# Altium PCB miaow-foc-board.pcbdoc (part 9 of 10)
Units mil, origin at the board's own origin, x right, y up, seen from the top; angles counter-clockwise.
Board outline 2755.91 x 3149.61 mil, 6 copper layers (SIG1, GND2, SIG3, PWR4, GND5, SIG6), stack 60.566 mil thick; 437 components, 392 nets, 2120 pads, 1697 vias.
Unrouted connection lines stored in the file: 1090.
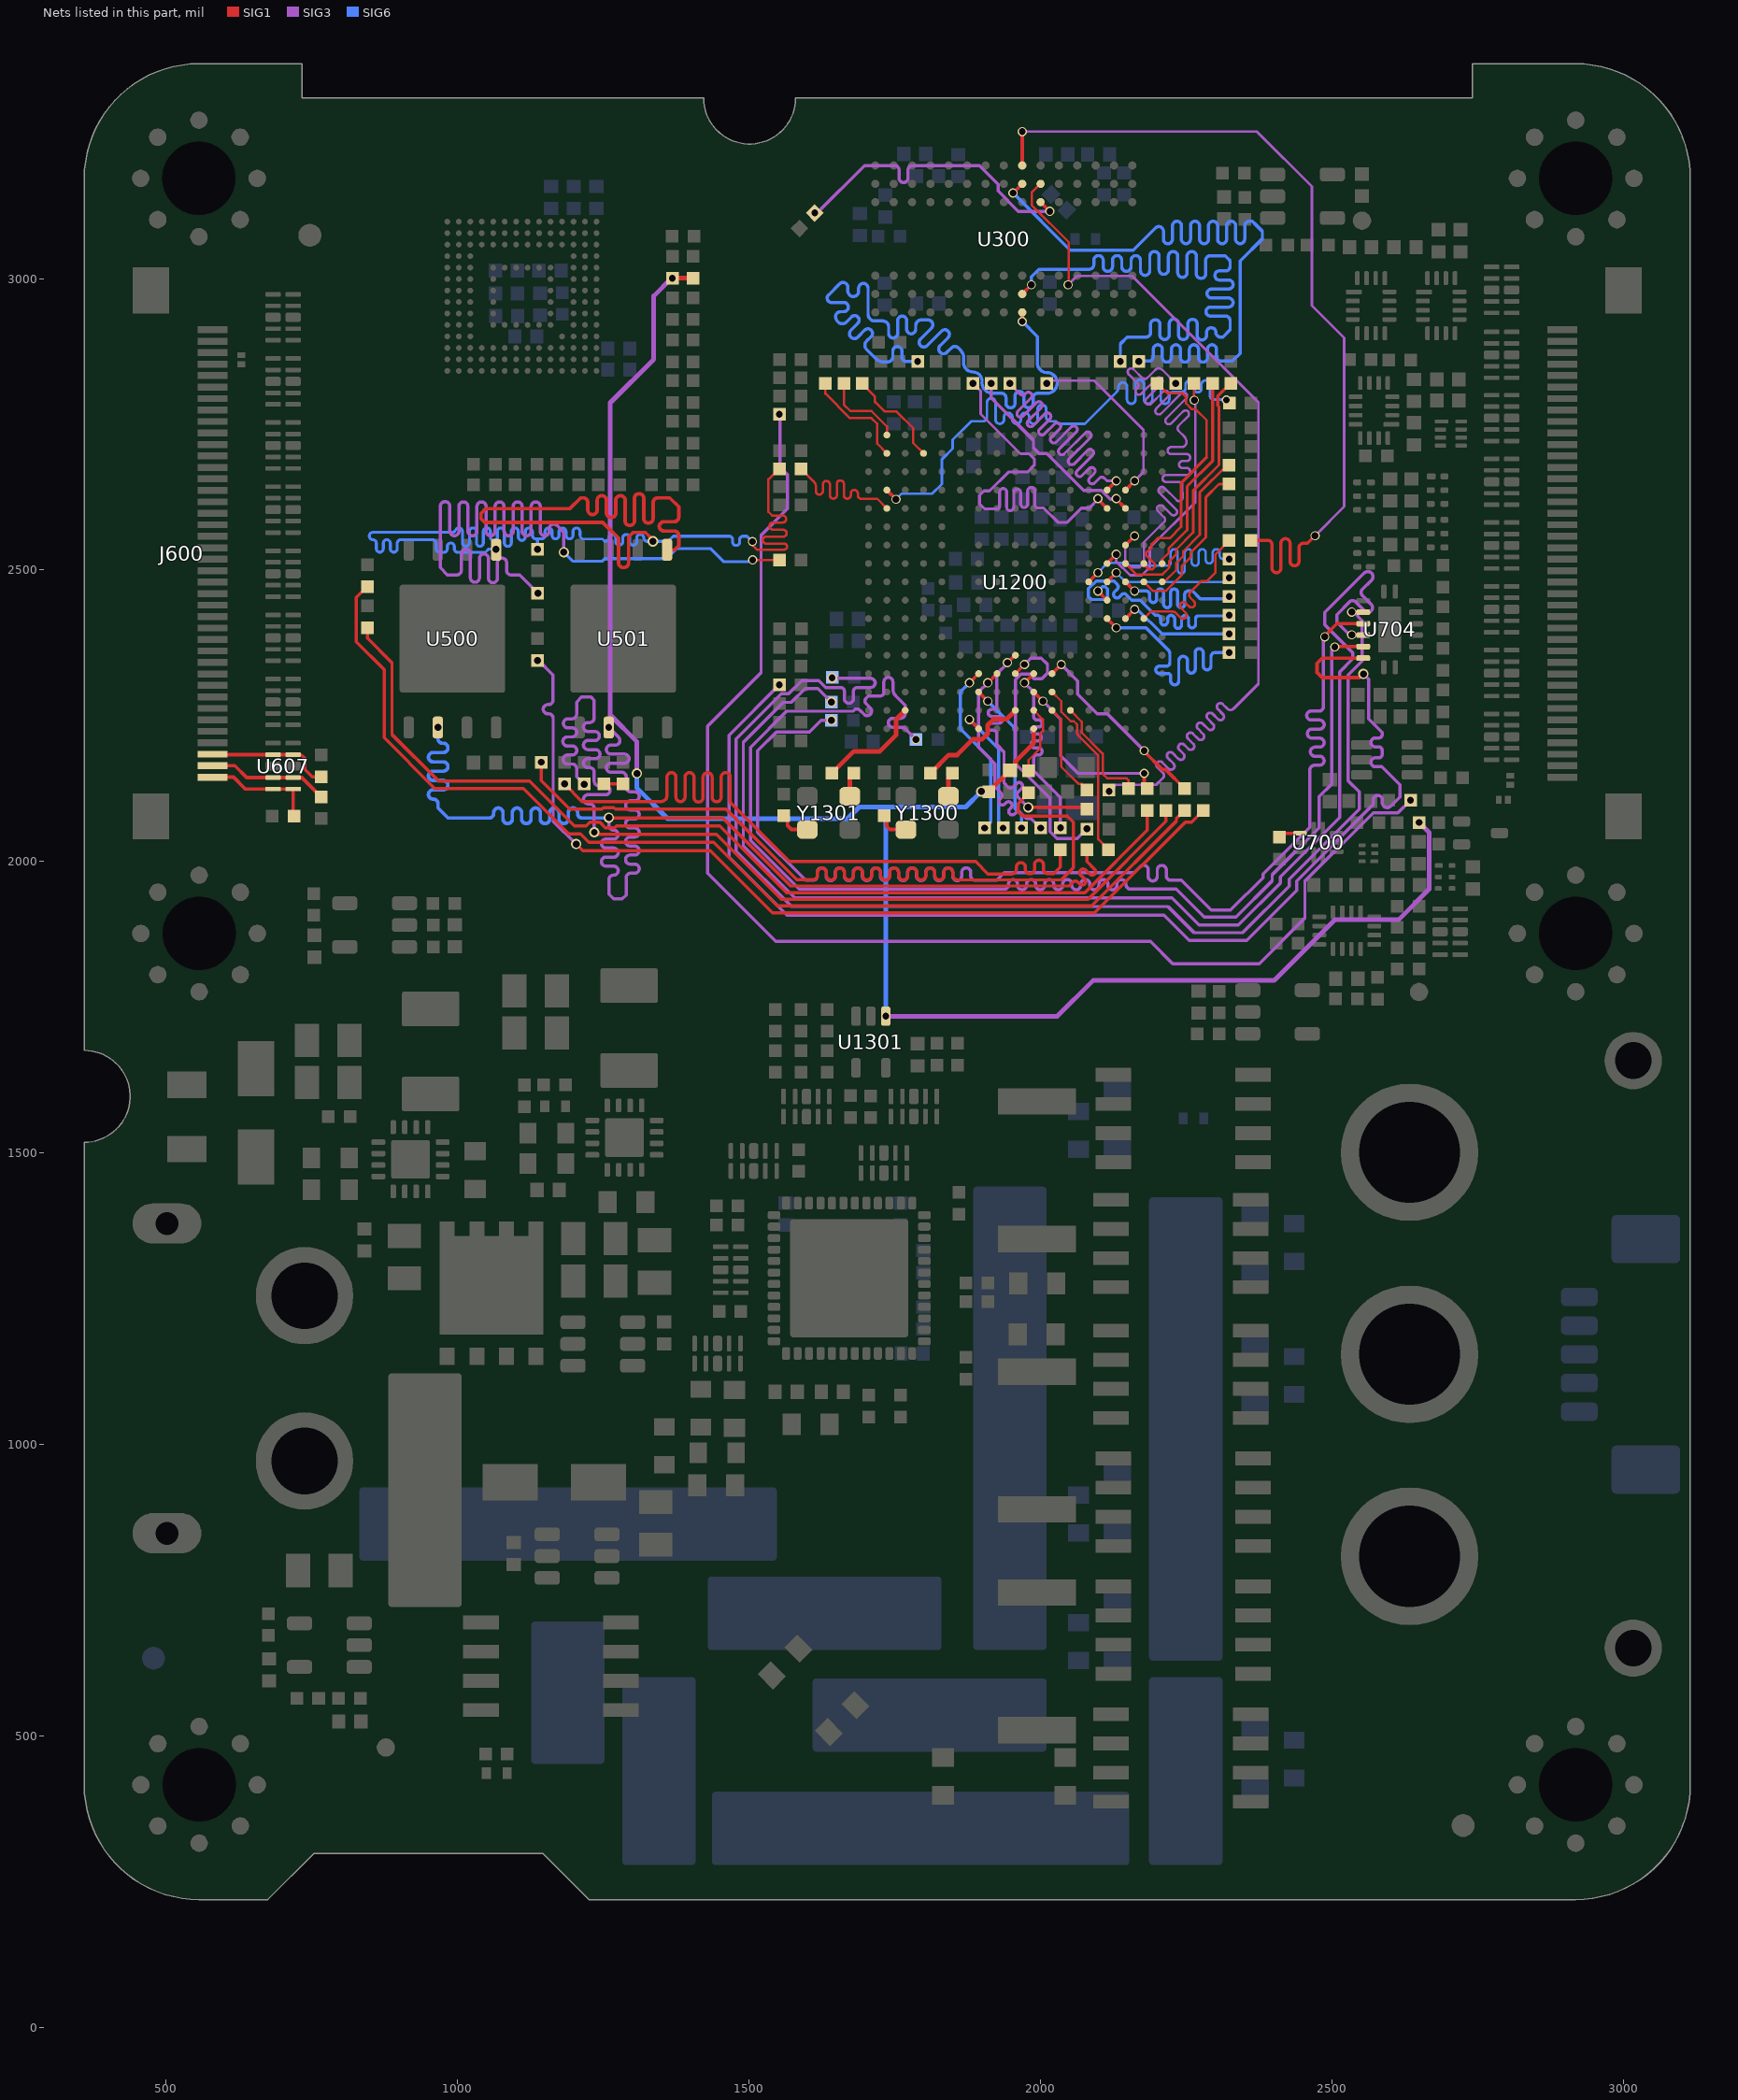
[diagram p12: the nets of this part, all layers, seen from the top]

## Via types
v1: diameter 17.72, hole 11.81, SIG1 to SIG6, tented both sides, 1223 vias
v2: diameter 15.75, hole 11.81, SIG1 to SIG6, tented both sides, 453 vias
v3: diameter 17.72, hole 11.81, SIG1 to SIG6, tented top, 21 vias

## Nets (pads, with @x,y where several pads share a name; then routed paths per layer and width w, separated by ;. In a path a pad name is that pad's centre, name@x,y a point inside that pad or via, vN(x,y) a via of type N, cw(c..) or ccw(c..) an arc to the next point about the centre after c; other vN are vias at no path point) (continued)
NetR1346_1: R1346.1 U1200.U9 | length 252
  SIG1 w4: U1200.U9@2209.03,2479.82 2212.72,2479.82 2233.34,2500.45 2233.34,2512.31 2245.05,2524.02 2245.05,2532.26 2273.62,2560.83 ; R1346.1@2320.03,2679.69 R1346.1@2324.05,2679.69
  SIG1 w5: 2273.62,2560.83 2273.62,2633.28 R1346.1@2320.03,2679.69
NetR1347_1: R1347.1 U1200.R13 | length 341.9
  SIG1 w6: v2@2130.29,2621.55 U1200.R13@2146.04,2605.81
  SIG3 w5.5: v2(1915.89,2820.56) 1915.89,2795.18 1988.18,2722.89 1988.18,2709.41 1997.72,2699.88 2010.93,2699.88 2074,2636.82 2104.89,2636.82 2120.16,2621.55 v2@2130.29,2621.55
  other v2: 2130.29,2622.55
NetR1348_1: R1348.1 U1200.T9 | length 282.6
  SIG1 w4: U1200.T9@2177.53,2479.82 2192.68,2464.67 2215.82,2464.67 2242.51,2491.36 2242.51,2506.69 2257.67,2521.85 2257.67,2529.93 2284.16,2556.42
  SIG1 w5: 2284.16,2556.42 2284.16,2625.25 2306.47,2647.56 R1348.1@2324.05,2647.56
NetR1349_1: R1349.1 U1200.P13 | length 761.6
  SIG1 w6: v2@2098.79,2621.55 U1200.P13@2114.54,2605.81
  SIG3 w5: v2@1884.13,2820.69 1897.52,2807.31 1897.52,2767.77 1965.59,2699.69 1980.48,2699.69 1989.36,2690.82 ; 1989.52,2690.82 1989.52,2679.82 1977.82,2668.12 1945.04,2668.12 1912.84,2635.92 1903.16,2635.92 1895.6,2628.36 1895.6,2613.51 1904.21,2604.9 1925.27,2604.9 ccw(c1925.27,2609.75) 1930.12,2609.75 1930.12,2633.98 cw(c1936.12,2633.98) 1942.12,2633.98 1942.12,2607.92 ccw(c1948.16,2607.9) 1954.2,2607.92 1954.2,2633.08 cw(c1960.2,2633.08) 1966.2,2633.08 1966.2,2613.31 ccw(c1972.2,2613.31) 1978.2,2613.31 1978.2,2635.95 cw(c1984.2,2635.95) 1990.2,2635.95 1990.2,2612.61 ccw(c1996.31,2612.61) 1996.31,2606.5 2005.76,2606.5 2030.78,2581.48 2045.51,2581.48 2070.29,2606.26 2083.73,2606.26 v2@2099.27,2621.79
  other v2: 2098.79,2622.55 1884.27,2820.56
NetR1350_1: R1350.1 U1200.P9 | length 225.5
  SIG1 w6: U1200.P9@2114.54,2479.82 v2(2130.29,2495.57)
  SIG6 w4: v2(2130.29,2495.57) 2146.04,2479.82 2316.95,2479.82 v2(2324.05,2486.93)
NetR1351_1: R1351.1 U1200.P14 | length 877
  SIG1 w6: U1200.P14@2114.54,2637.3 v2(2130.29,2653.05)
  SIG3 w5: v2(1947.51,2820.56) 1947.51,2819.75 1952.94,2814.33 1965.35,2801.91 ccw(c1969.59,2806.15) 1973.84,2801.91 1975.37,2803.44 cw(c1979.61,2799.2) 1983.85,2803.44 cw(c1979.61,2799.2) 1983.85,2794.96 1961.55,2772.65 ccw(c1965.79,2768.41) 1970.03,2764.17 1993.21,2787.34 cw(c1997.45,2783.1) 2001.69,2787.34 cw(c1997.45,2783.1) 2001.69,2778.86 1979.04,2756.2 ccw(c1983.28,2751.96) 1987.52,2747.72 2007.9,2768.1 cw(c2012.15,2763.85) 2016.39,2768.1 cw(c2012.15,2763.85) 2016.39,2759.61 1998.73,2741.95 ccw(c2002.97,2737.71) 1998.73,2733.47 ccw(c2002.97,2737.71) 2007.22,2733.47 2024.77,2751.02 cw(c2029.02,2746.78) 2033.34,2742.62 2018.88,2728.16 ccw(c2023.12,2723.92) 2018.88,2719.68 ccw(c2023.12,2723.92) 2027.36,2719.68 2053.15,2745.46 cw(c2057.41,2741.24) 2061.63,2736.97 2032.67,2708.01 ccw(c2036.92,2703.77) 2032.67,2699.53 ccw(c2036.92,2703.77) 2041.16,2699.53 2077.03,2735.4 cw(c2081.27,2731.16) 2085.51,2726.91 2049.64,2691.04 ccw(c2053.89,2686.8) 2049.64,2682.56 ccw(c2053.89,2686.8) 2058.13,2682.56 2081.11,2705.54 cw(c2085.35,2701.3) 2089.59,2697.05 2063.1,2670.56 ccw(c2067.34,2666.32) 2071.59,2662.07 2083.79,2674.28 cw(c2088.06,2670.06) 2092.28,2665.79 2084.67,2658.18 ccw(c2088.93,2653.96) 2093.15,2649.7 2101.11,2657.66 cw(c2105.36,2653.42) 2109.6,2657.66 2111.01,2656.25 2114.21,2653.05 v2(2130.29,2653.05)
NetR1352_1: R1352.1 U1200.N9 | length 450
  SIG1 w6: U1200.N9@2083.05,2479.82 v2(2098.79,2495.57)
  SIG6 w4: v2(2098.79,2495.57) 2115.88,2512.65 2139.2,2512.65 2144.27,2507.59 2218.41,2507.59 ccw(c2218.41,2512.97) 2223.8,2512.97 2223.8,2529.85 cw(c2229.8,2529.85) 2235.8,2529.85 2235.8,2500.18 ccw(c2241.8,2500.18) 2247.8,2500.18 2247.8,2529.85 cw(c2253.8,2529.85) 2259.8,2529.85 2259.8,2513.43 ccw(c2265.8,2513.43) 2271.8,2513.43 2271.8,2529.85 cw(c2277.8,2529.85) 2283.8,2529.85 2283.8,2517.37 ccw(c2289.8,2517.37) 2295.8,2517.37 2295.8,2529.85 cw(c2301.8,2529.85) 2307.8,2529.85 2307.8,2525.06 ccw(c2313.8,2525.06) 2313.8,2519.06 2322.68,2519.06 v2(2324.05,2519.06)
NetR1353_1: R1353.1 U1200.R14 | length 318.9
  SIG1 w6: U1200.R14@2146.04,2637.3 v2(2161.79,2653.05)
  SIG3 w4.5: v2(2010.76,2820.56) 2015.2,2825 2092.25,2825 2176.92,2740.33 2176.92,2719.73 2176.97,2719.68 2176.97,2707.87 2176.92,2707.82 2176.92,2668.19 v2(2161.79,2653.05)
NetR1354_1: R1354.1 U1200.P10 | length 456.8
  SIG1 w4: R1354.1@2263.73,2820.25 2263.73,2791.31 v2@2264.16,2790.88
  SIG1 w6: U1200.P10@2114.54,2511.32 v2(2130.29,2527.07)
  SIG3 w4.5: v2(2130.29,2527.07) 2130.29,2514.86 2154.09,2491.06 2174.22,2491.06 2187.76,2504.59 2187.76,2538.42 2265.84,2616.51 2265.84,2789.7 v2(2264.16,2791.38)
NetR1355_1: R1355.1 U1200.D16 | length 175.7
  SIG1 w4: R1355.1@1694.54,2820.56 1694.54,2818.98 1716.35,2797.16 1716.35,2788.6 1732.94,2772 1753.22,2772 1781.71,2743.52 1781.71,2718.17 U1200.D16@1799.58,2700.29
NetR1356_1: R1356.1 U1200.R10 | length 449.5
  SIG1 w4: U1200.R10@2146.04,2511.32 2164.66,2492.7 2209.61,2492.7 2221.36,2504.44 2221.36,2515.43 2233.4,2527.47 2233.4,2535.67 2262.61,2564.88
  SIG1 w5: 2262.61,2564.88 2262.61,2636.67 2306.36,2680.42 2306.36,2780.55 2304.39,2782.52 2304.39,2798.4 2326.24,2820.25 R1356.1@2326.97,2820.25
NetR1357_1: R1357.1 U1200.B17 | length 140.4
  SIG1 w4: R1357.1@1662.91,2820.56 1662.91,2784.11 1674.24,2772.78 1710.36,2772.78 1736.59,2746.56 U1200.B17@1736.59,2731.79
NetR1358_1: R1358.1 U1200.T10 | length 456.7
  SIG1 w4: U1200.T10@2177.53,2511.32 2177.53,2509.53 2186.05,2501.01 2192.06,2501.01 2196.7,2505.65 2196.7,2510.37 2181.56,2525.52 2181.56,2529.38 2190.78,2538.6 2190.78,2544.36 2201.2,2554.77 2222.16,2554.77 2241.74,2574.35 ; R1358.1@2200.49,2820.56 2217.53,2803.52 2243.07,2803.52 2250.18,2796.41 2250.18,2785.8 2259.99,2775.99 2266.29,2775.99 2285.41,2756.86 2285.41,2693.44
  SIG1 w5: 2241.74,2574.35 2241.74,2649.77 2285.41,2693.44
NetR1359_1: R1359.1 U1200.B16 | length 185.3
  SIG1 w4: R1359.1@1631.29,2820.56 1631.29,2802.88 1673.34,2760.83 1710.22,2760.83 1720.03,2751.02 1720.03,2716.99 U1200.B16@1736.59,2700.43
NetR1360_1: R1360.1 U1200.U10 | length 344.6
  SIG1 w4: U1200.U10@2209.03,2511.32 2209.03,2518.44 2220.37,2529.79 2220.37,2537.37 2251.93,2568.93
  SIG1 w5: 2251.93,2568.93 2251.93,2643.69 2295.55,2687.3 R1360.1@2295.55,2820.06
NetR1361_1: R1361.1 U1200.R11 | length 1244.9
  SIG1 w6: U1200.R11@2146.04,2542.81 v2(2161.79,2558.56)
  SIG3 w4: v2(2161.79,2558.56) 2145.31,2542.09 2145.31,2515.47 2156.2,2504.58 2170.25,2504.58 2177.63,2511.96 2177.63,2547.67 2212.23,2582.26 ccw(c2207.99,2586.51) 2212.23,2590.75 2201.85,2601.13 cw(c2206.09,2605.37) 2210.34,2609.61 2224.43,2595.52 ccw(c2228.67,2599.76) 2232.91,2604 2204.4,2632.52 cw(c2208.64,2636.76) 2212.89,2641 2233.84,2620.05 ccw(c2238.03,2624.24) 2243.96,2624.24 2243.7,2643.52 2243.7,2645.52 ccw(c2238.13,2645.52) 2238.13,2651.1 2215.64,2651.1 cw(c2215.64,2657.1) 2215.64,2663.1 2251.16,2663.1 ccw(c2251.16,2669.1) 2251.16,2675.1 2243.92,2675.1 cw(c2243.92,2681.1) 2243.92,2687.1 2251.16,2687.1 ccw(c2251.16,2693.1) 2251.16,2699.1 2224.51,2699.1 cw(c2224.51,2705.1) 2224.51,2711.1 2242.43,2711.1 ccw(c2242.43,2719.59) 2250.92,2719.59 ccw(c2237.49,2719.59) 2246.98,2729.08 2237.08,2738.98 cw(c2241.33,2743.23) 2237.08,2747.47 2253.33,2763.71 ccw(c2249.08,2767.95) 2244.84,2772.19 2224.66,2752.01 cw(c2220.42,2756.26) 2216.17,2760.5 2249.93,2794.26 ccw(c2245.69,2798.5) 2241.45,2802.74 2207.48,2768.78 cw(c2203.24,2773.02) 2199,2777.26 2219.05,2797.32 ccw(c2214.81,2801.56) 2210.57,2805.8 2190.47,2785.71 cw(c2186.23,2789.95) 2181.98,2794.19 2207.96,2820.16 ccw(c2203.71,2824.41) 2199.47,2828.65 2173.53,2802.71 cw(c2169.28,2806.97) 2165.02,2811.22 2166.43,2812.63 ccw(c2162.19,2816.87) 2166.43,2821.12 2151.68,2835.87 cw(c2155.92,2840.11) 2160.17,2844.35 2174.92,2829.6 ccw(c2179.16,2833.84) 2183.4,2829.6 2197.28,2843.48 cw(c2203.23,2837.53) 2209.19,2843.48 v2(2232.11,2820.56)
NetR1362_1: R1362.1 U1200.L2 | length 163.5
  SIG1 w4: U1200.L2@2020.05,2259.35 2035.8,2243.6 2035.8,2162.72 2065.66,2132.86 2071.26,2132.86 R1362.1@2080.09,2124.04
NetR1363_1: R1363.1 U1200.G4 | length 303.8
  SIG1 w5.5: v2(1878.32,2306.59) U1200.G4@1894.07,2322.34
  SIG6 w5.5: v2(1878.32,2306.59) 1862.57,2290.85 1862.57,2227.85 1914.83,2175.6 1914.83,2118.66 1914.83,2067.94 v1(1904.42,2057.53)
NetR1364_1: R1364.1 U1200.M2 | length 194.9
  SIG1 w4: U1200.M2@2051.55,2259.35 2071.19,2239.71 2071.19,2220.71 2106.91,2185 2106.91,2150.64 2114.66,2142.9 2147.85,2142.9 2151.4,2139.34 R1364.1@2151.4,2125.28
NetR1365_1: R1365.1 U1200.G3 | length 263.8
  SIG1 w6: U1200.G3@1894.07,2290.85 v2(1909.82,2275.1)
  SIG6 w6: v2(1909.82,2275.1) 1956.44,2228.47 1956.44,2090.82 1967.68,2079.58 v1(1967.68,2057.53)
NetR1366_1: R1366.1 U1200.G1 | length 232.3
  SIG1 w5.5: v2(1878.32,2243.6) U1200.G1@1894.07,2227.85
  SIG6 w5.5: v2(1878.32,2243.6) 1928.35,2193.57 1928.35,2076.43 1928.35,2065.23 v1(1936.05,2057.53)
NetR1367_1: R1367.1 U1200.H4 | length 365.2
  SIG1 w5.5: v2(1909.82,2306.59) U1200.H4@1925.56,2322.34
  SIG3 w5.5: v2(1909.82,2306.59) 1894.07,2290.85 1894.07,2195.69 1922.25,2167.51 1922.25,2127.8 1924.94,2125.12 1932.49,2117.57 cw(c1928.24,2113.32) 1932.49,2109.08 1930.57,2107.17 ccw(c1934.82,2102.92) 1930.57,2098.68 ccw(c1934.82,2102.92) 1939.06,2098.68 1941.17,2100.79 cw(c1945.41,2096.55) 1949.65,2100.79 cw(c1945.41,2096.55) 1949.65,2092.3 1947.54,2090.2 ccw(c1951.79,2085.95) 1947.54,2081.71 ccw(c1951.79,2085.95) 1956.03,2081.71 1957.94,2083.62 cw(c1962.19,2079.38) 1966.43,2083.62 1967.84,2082.21 1976.14,2073.92 1983.93,2073.92 v1(2000.32,2057.53)
NetR1368_1: R1368.1 U1200.J5 | length 489.9
  SIG1 w5.5: v2(1943.49,2341.23) 1956.09,2353.84 U1200.J5@1957.06,2353.84 ; v1(1979.19,2093.07) 2078.32,2093.07 R1368.1@2080.09,2091.3
  SIG3 w5.5: v2(1943.49,2341.23) 1943.49,2340.27 1925.56,2322.34 1925.56,2278.84 1925.56,2267.08 cw(c1919.56,2267.08) 1919.56,2261.08 1916.44,2261.08 ccw(c1916.44,2255.08) 1916.44,2249.08 1928.94,2249.08 cw(c1928.94,2243.08) 1928.94,2237.08 1915.6,2237.08 ccw(c1915.6,2231.08) 1915.6,2225.08 1919.56,2225.08 cw(c1919.56,2219.08) 1925.56,2219.08 1925.56,2217.08 1925.56,2200.12 1937.67,2188.01 1937.67,2134.59 1944.67,2127.59 ccw(c1948.91,2131.83) 1953.15,2127.59 1959.37,2133.81 cw(c1963.62,2129.57) 1967.86,2133.81 cw(c1963.62,2129.57) 1967.86,2125.33 1961.64,2119.11 ccw(c1965.88,2114.86) 1961.64,2110.62 v1(1979.19,2093.07)
NetR1369_1: R1369.1 U1200.J4 | length 512.6
  SIG1 w5.5: U1200.J4@1957.06,2322.34 v2(1972.81,2338.09)
  SIG3 w5.5: v2(1972.81,2338.09) 1983.89,2349.17 2001.56,2349.17 2012.19,2338.55 2012.19,2323.42 2002.55,2313.78 1988.92,2313.78 1981.2,2321.5 1966.9,2321.5 1957.06,2311.66 1957.06,2167.71 2016.33,2108.44 2016.33,2076.43 2016.33,2051.5 2028.4,2039.43 2063.28,2039.43 v1(2080.09,2056.25)
NetR1370_1: R1370.1 U1200.K2 | length 120.5
  SIG1 w4: R1370.1@1979.73,2155.51 1979.73,2174.17 1999.65,2194.1 1999.65,2219.36 2004.3,2224.02 2004.3,2243.6 U1200.K2@1988.56,2259.35
NetR1371_1: R1371.1 U1200.K3 | length 312.5
  SIG1 w6: U1200.K3@1988.56,2290.85 v2(2004.3,2275.1) ; v2(2178.18,2151.31) 2178.18,2130.49 R1371.1@2183.39,2125.28
  SIG3 w5.5: v2(2004.3,2275.1) 2035.24,2244.16 2035.24,2181.11 2065.03,2151.31 v2(2178.18,2151.31)
NetR1373_1: R1373.1 U1200.K4 | length 365.8
  SIG1 w6: v2(1972.81,2306.59) U1200.K4@1988.56,2322.34
  SIG3 w5.5: v2(1972.81,2306.59) 1988.56,2290.85 1988.56,2262.53 1988.56,2248.92 ccw(c1994.56,2248.92) 1994.56,2242.92 1996.93,2242.92 cw(c1996.93,2236.92) 1996.93,2230.92 1990.98,2230.92 ccw(c1990.98,2224.92) 1990.98,2218.92 1995.8,2218.92 cw(c1995.8,2212.92) 1995.8,2206.92 1990.19,2206.92 ccw(c1990.19,2200.92) 1990.19,2194.92 1996.93,2194.92 cw(c1996.93,2188.92) 1996.93,2182.92 1994.56,2182.92 ccw(c1994.56,2176.92) 1988.56,2176.92 1988.56,2162.92 1988.56,2156 2034.57,2109.99 v1(2034.57,2057.59)
NetR1374_1: R1374.1 U1200.L4 | length 336.1
  SIG1 w6: U1200.L4@2020.05,2322.34 v2(2035.8,2338.09) ; v2@2177.84,2190.09 2177.84,2189.35 2209.41,2157.78 2214.87,2157.78 R1374.1@2247.37,2125.28
  SIG3 w5.5: v2(2035.8,2338.09) 2063.98,2309.91 2063.98,2287.17 2097.68,2253.46 2114.8,2253.46 v2(2178.18,2190.09)
NetR1375_1: R1375.1 U1200.L3 | length 314.1
  SIG1 w4: U1200.L3@2020.05,2290.85 2035.8,2275.1 2035.8,2256.89 2052.04,2240.66 2057.51,2240.66 2063.48,2234.69 2063.48,2219.57 2063.69,2219.36 2063.69,2217.61 2099.26,2182.03 2099.26,2181.63 2099.39,2181.5 2099.39,2037.99 R1375.1@2117.19,2020.19
NetR1376_1: R1376.1 U1200.J2 | length 197.5
  SIG1 w8: R1376.1@1811.54,2154.51 1814.55,2154.51 1842.83,2182.79 1857.14,2182.79 1884.32,2209.97 1900.32,2209.97 1909.72,2219.38 1909.72,2234.03 1919.59,2243.9 1941.61,2243.9 U1200.J2@1957.06,2259.35
NetR1376_2: R1376.2 Y1300.3 | length 33.2
  SIG1 w8: Y1300.3@1842.31,2112.3 R1376.2@1842.31,2145.54
NetR1377_1: R1377.1 U1200.B13 | length 296.2
  SIG1 w4: R1377.1@1589.45,2673.9 1610.73,2652.62 cw(c1601.01,2642.9) 1614.76,2642.9 1614.76,2635.59 ccw(c1620.75,2635.56) 1626.75,2635.56 1626.75,2646.99 cw(c1632.75,2646.99) 1638.75,2646.99 1638.75,2628.49 ccw(c1644.75,2628.49) 1650.75,2628.49 1650.75,2647.91 cw(c1656.75,2647.91) 1662.75,2647.91 1662.75,2628.6 ccw(c1668.75,2628.6) 1674.75,2628.6 1674.75,2631.52 cw(c1680.75,2631.52) 1686.75,2631.52 1686.75,2628.34 ccw(c1692.75,2628.34) 1692.75,2622.34 1720.06,2622.34 U1200.B13@1736.59,2605.81
NetR1378_1: R1378.1 U1200.T7 | length 289.3
  SIG1 w4: U1200.T7@2177.53,2416.83 2189.42,2428.71 2227.21,2428.71 cw(c2227.21,2421.23) 2232.51,2426.52 2240.68,2418.35 ccw(c2244.92,2422.6) 2249.16,2418.35 ccw(c2244.92,2422.59) 2249.16,2426.84 2241.26,2434.74 cw(c2245.5,2438.98) 2249.74,2443.23 2255.23,2437.74 ccw(c2259.47,2441.98) 2263.71,2437.74 ccw(c2259.47,2441.98) 2263.71,2446.23 2257.58,2452.36 cw(c2262.6,2457.38) 2257.58,2462.41 2276.18,2481.01 2285.8,2481.01 2300.54,2495.76 2300.54,2527.22 2324.05,2550.73 R1378.1@2324.05,2551.18
NetR1379_1: R1379.1 U1200.R7 | length 201.8
  SIG1 w6: U1200.R7@2146.04,2416.83 v2(2161.79,2432.58)
  SIG6 w5.5: v2(2161.79,2432.58) 2166.77,2432.58 2209.12,2390.22 v2@2323.73,2390.22
  other v2: 2324.05,2390.55
NetR1380_1: R1380.1 U1200.P7 | length 481.6
  SIG1 w6: U1200.P7@2114.54,2416.83 v2(2130.29,2401.08)
  SIG6 w5.5: v2(2130.29,2401.08) 2181.42,2401.08 2219.01,2363.49 cw(c2211.26,2355.73) 2222.22,2355.73 2222.22,2340.88 cw(c2216.52,2340.88) 2216.52,2335.19 2204.32,2335.19 ccw(c2204.3,2328.92) 2204.32,2322.66 2218.73,2322.66 cw(c2218.73,2317.71) 2223.68,2317.71 2223.68,2309.96 ccw(c2230.58,2309.92) 2237.48,2309.96 2237.48,2344.65 cw(c2245,2344.63) 2252.52,2344.65 2252.52,2329.85 ccw(c2259.06,2329.82) 2265.61,2329.85 2265.61,2358.36 cw(c2272.48,2358.41) 2279.36,2358.36 2279.36,2335.62 ccw(c2286.1,2335.64) 2292.84,2335.62 2292.84,2351.85 cw(c2299.41,2351.85) 2299.41,2358.42 v2(2324.05,2358.42)
NetR1381_1: R1381.1 Y1301.3 | length 35.3
  SIG1 w8: Y1301.3@1672.96,2111.95 R1381.1@1672.96,2147.26
NetR1381_2: R1381.2 U1200.C2 | length 186
  SIG1 w8: R1381.2@1642.46,2151.5 1680.1,2189.14 1724.72,2189.14 1752.21,2216.63 1752.21,2243.48 U1200.C2@1768.08,2259.35
NetR1382_1: R1382.1 U1200.P8 | length 494
  SIG1 w6: v2(2098.79,2464.07) U1200.P8@2114.54,2448.33
  SIG6 w5.5: v2(2098.79,2464.07) 2106.19,2471.47 2110.88,2471.47 2114.93,2467.42 2114.93,2453.75 2110.47,2449.29 2110.31,2449.45 2088.12,2449.45 2082.69,2454.88 2082.69,2468.11 2095.69,2481.11 2126.32,2481.11 2131.84,2475.59 cw(c2127.59,2471.35) 2131.84,2467.1 2127.23,2462.5 ccw(c2131.48,2458.26) 2127.23,2454.02 ccw(c2131.48,2458.26) 2135.72,2454.02 2139.67,2457.96 cw(c2143.59,2454.04) 2147.51,2457.96 2156.96,2448.52 2171.1,2448.52 2196.94,2422.67 2200.33,2422.67 cw(c2200.33,2416.67) 2206.33,2416.67 2206.33,2411.58 ccw(c2212.33,2411.58) 2218.33,2411.58 2218.33,2416.46 cw(c2224.33,2416.46) 2230.33,2416.46 2230.33,2406.02 ccw(c2236.33,2406.02) 2242.33,2406.02 2242.33,2416.14 cw(c2248.33,2416.14) 2254.33,2416.14 2254.33,2406.87 ccw(c2260.33,2406.87) 2266.33,2406.87 2266.33,2416.67 cw(c2271.08,2416.67) 2271.08,2421.43 2322.81,2421.43 v2(2324.05,2422.67)
NetR1384_1: R1384.1 U1200.R9 | length 329.5
  SIG1 w6: U1200.R9@2146.04,2479.82 v2(2161.79,2464.07)
  SIG6 w5.5: v2(2161.79,2464.07) 2167.63,2464.07 2181.63,2464.07 cw(c2181.63,2458.07) 2187.63,2458.07 2187.63,2450.25 ccw(c2193.63,2450.25) 2199.63,2450.25 2199.63,2461.67 cw(c2205.63,2461.67) 2211.63,2461.67 2211.63,2441.44 ccw(c2217.63,2441.44) 2223.63,2441.44 2223.63,2461.67 cw(c2229.63,2461.67) 2235.63,2461.67 2235.63,2441.44 ccw(c2241.63,2441.44) 2247.63,2441.44 2247.63,2458.07 cw(c2253.63,2458.07) 2253.63,2464.07 2260.84,2464.07 2274.35,2450.56 2319.81,2450.56 v2(2324.05,2454.8)
NetR1386_2: R1386.2 Y1300.1 | length 57.3
  SIG1 w6: R1386.2@1729.78,2078.72 1736.61,2071.9 1736.61,2060.15 1741.54,2055.21 Y1300.1@1770.46,2055.21
NetR1387_2: R1387.2 Y1301.1 | length 56.3
  SIG1 w6: R1387.2@1559.44,2078.38 1566.27,2071.55 1566.27,2061.55 1572.96,2054.86 Y1301.1@1600.13,2054.86
NOR_CS: R500.1 R1377.2 U500.1 U501.1 | length 2990.3
  SIG1 w4: v2(1505.85,2548.84) 1505.85,2543.11 1513.74,2535.22 1560.5,2535.22 ccw(c1560.5,2540.35) 1560.5,2545.49 1529.67,2545.49 cw(c1529.65,2551.37) 1529.67,2557.26 1558.58,2557.26 ccw(c1558.58,2563.26) 1558.58,2569.26 1541.3,2569.26 cw(c1541.34,2575.48) 1539.9,2569.42 cw(c1541.34,2575.48) 1539.9,2581.53 cw(c1541.34,2575.48) 1541.3,2581.7 1557.91,2581.7 ccw(c1557.88,2587.64) 1557.91,2593.59 1539.59,2593.59 1533.39,2599.79 1533.39,2655.6 R1377.2@1551.69,2673.9
  SIG1 w6: v1@1334.62,2552.29 1322.3,2564.61 1301.23,2564.61 1293.56,2556.94 1293.56,2513.01 cw(c1284.88,2512.96) 1276.2,2513.01 1276.2,2554.77 1249.11,2581.87 1046.59,2581.87 1040.22,2588.23 1040.22,2597.13 1048.71,2605.62 1192.8,2605.62 1211.15,2623.97 1215.47,2623.97 cw(c1215.47,2615.97) 1223.47,2615.97 1223.47,2603.15 ccw(c1231.47,2603.15) 1239.47,2603.15 1239.47,2619.75 cw(c1247.47,2619.75) 1255.47,2619.75 1255.47,2598.18 ccw(c1263.47,2598.18) 1271.47,2598.18 1271.47,2619.75 cw(c1279.47,2619.75) 1287.47,2619.75 1287.47,2584.53 ccw(c1295.47,2584.53) 1303.47,2584.53 1303.47,2623.07 cw(c1311.47,2623.07) 1319.47,2623.07 1319.47,2588.61 ccw(c1327.47,2588.61) 1335.47,2588.61 1335.47,2615.97 cw(c1343.47,2615.97) 1343.47,2623.97 1364.14,2623.97 1379.55,2608.56 1379.55,2591.08 cw(c1371.55,2591.08) 1371.55,2583.08 1354.11,2583.08 ccw(c1354.11,2575.08) 1354.11,2567.08 1371.55,2567.08 cw(c1371.55,2559.08) 1379.55,2559.08 1379.55,2541.95 1372.31,2534.7 U501.1@1359.36,2534.7
  SIG6 w4: 1210.04,2559.62 ccw(c1216.04,2559.62) 1216.04,2553.62 1247.95,2553.62 1252.27,2549.3
  SIG6 w5: 854.53,2552.24 cw(c854.53,2546.24) 860.53,2546.24 860.53,2536.76 ccw(c866.53,2536.76) 872.53,2536.76 872.53,2546.24 cw(c878.53,2546.24) 878.53,2552.24 cw(c878.53,2546.24) 884.53,2546.24 884.53,2536.76 ccw(c890.53,2536.76) 896.53,2536.76 896.53,2546.24 cw(c902.53,2546.24) 902.53,2552.24 956.9,2552.24 cw(c956.9,2546.01) 963.13,2546.01 963.13,2537 ccw(c969.64,2537) 969.64,2530.49 976.41,2530.49 ccw(c976.41,2536.49) 982.41,2536.49 982.41,2540.47 cw(c988.41,2540.47) 994.41,2540.47 994.41,2536.49 ccw(c1000.41,2536.49) 1000.41,2530.49 1047.68,2530.49 1053.01,2535.83 v1(1066.1,2535.83) ; 854.73,2552.24 cw(c854.73,2558.5) 854.73,2564.76 992.8,2564.76 997.75,2569.72 ; 997.4,2569.98 cw(c1002.25,2566.44) 1008.25,2566.44 1008.25,2547.05 ccw(c1014.25,2547.05) 1020.25,2547.05 1020.25,2566.44 cw(c1026.25,2566.44) 1032.25,2566.44 1032.25,2546.8 ccw(c1038.25,2546.8) 1044.25,2546.8 1044.25,2566.44 cw(c1050.25,2566.44) 1056.25,2566.44 1056.25,2556.69 ccw(c1062.25,2556.69) 1068.25,2556.69 1068.25,2566.44 cw(c1074.25,2566.44) 1080.25,2566.44 1080.25,2546.56 ccw(c1086.25,2546.56) 1092.25,2546.56 1092.25,2566.44 cw(c1098.25,2566.44) 1104.25,2566.44 1104.25,2556.88 ccw(c1110.25,2556.88) 1116.25,2556.88 1116.25,2566.14 cw(c1122.25,2566.14) 1128.25,2566.14 1128.25,2559.62 ccw(c1134.25,2559.62) 1134.25,2553.62 1134.49,2553.38 1137.24,2553.38 ; v1(1137.24,2535.83) 1137.24,2553.38 ; 1210.04,2559.62 1210.04,2566.15 ccw(c1204.04,2566.15) 1198.04,2566.15 1198.04,2559.59 cw(c1192.04,2559.59) 1186.04,2559.59 1186.04,2566.15 ccw(c1180.04,2566.15) 1174.04,2566.15 1174.04,2559.59 cw(c1168.04,2559.59) 1162.04,2559.59 1162.04,2566.15 ccw(c1156.04,2566.15) 1150.04,2566.15 1150.04,2559.62 cw(c1144.04,2559.62) 1144.04,2553.62 1137,2553.62 1137.24,2553.38 ; 1252.27,2549.3 1253.43,2549.3 ccw(c1253.43,2555.3) 1259.43,2555.3 1259.43,2555.68 ; 1259.43,2555.18 cw(c1265.43,2555.18) 1271.43,2555.18 ; 1271.43,2548.2 1271.43,2555.68 ; 1271.43,2548.7 ccw(c1277.43,2548.7) 1283.43,2548.7 ; 1283.43,2548.2 1283.43,2555.68 ; 1283.43,2555.18 cw(c1289.43,2555.18) 1295.43,2555.18 ; 1295.43,2548.2 1295.43,2555.68 ; 1295.43,2548.7 ccw(c1301.43,2548.7) 1307.43,2548.7 ; 1307.43,2548.2 1307.43,2555.68 ; 1307.43,2555.18 cw(c1313.43,2555.18) 1319.43,2555.18 ; 1319.43,2555.68 1319.43,2555.3 ccw(c1325.43,2555.3) 1325.43,2549.3 v1(1335.15,2549.3) 1361.21,2549.3 1370.09,2558.18 1466.01,2558.18 cw(c1466.01,2552.18) 1472.01,2552.18 1472.01,2548.2 ccw(c1478.01,2548.2) 1484.01,2548.2 1484.01,2552.18 cw(c1490.01,2552.18) 1490.01,2558.18 1496.51,2558.18 v2(1505.85,2548.84)
NOR_IO0: R501.1 R1373.2 | length 1357.5
  SIG1 w5.5: v1(1183.48,2133.09) 1213.48,2103.09 1349.47,2103.09 ccw(c1349.47,2112.82) 1359.2,2112.82 1359.2,2144.8 cw(c1366.95,2144.8) 1374.7,2144.8 1374.7,2110.56 ccw(c1382.45,2110.56) 1390.2,2110.56 1390.2,2144.8 cw(c1397.95,2144.8) 1405.7,2144.8 1405.7,2109.88 ccw(c1413.45,2109.88) 1421.2,2109.88 1421.2,2144.8 cw(c1428.95,2144.8) 1436.7,2144.8 1436.7,2110.29 ccw(c1444.45,2110.29) 1452.2,2110.29 1452.2,2144.8 cw(c1459.95,2144.8) 1467.7,2144.8 1467.7,2103.97 ccw(c1473.95,2103.97) 1469.53,2099.56 1569.2,1999.89 1888.96,1999.89 1910.17,1978.68 1950.39,1978.68 ccw(c1950.39,1987.14) 1958.85,1987.14 1958.85,1990.46 cw(c1966.6,1990.46) 1974.35,1990.46 1974.35,1986.68 ccw(c1982.1,1986.68) 1989.85,1986.68 1989.85,1994.52 cw(c1997.6,1994.52) 2005.35,1994.52 2005.35,1986.76 ccw(c2013.1,1986.76) 2013.1,1979.01 2023.12,1979.01 2034.3,1990.2 R1373.2@2034.3,2020.51
NOR_IO1: R503.1 R1374.2 | length 1850.7
  SIG1 w5.5: R503.1@845.15,2471.92 826.28,2453.05 826.28,2376.92 874.02,2329.18 874.02,2212.29 961.08,2125.23 1112.79,2125.23 1190.57,2047.45 1210.8,2047.45 1225.42,2032.83 1439.13,2032.83 1548.17,1923.79 2087.78,1923.79 2233.43,2069.44 2233.43,2073.93 R1374.2@2247.37,2087.88
NOR_IO2: R505.1 R1371.2 | length 1694.8
  SIG1 w5.5: R505.1@845.15,2400.95 845.15,2383.35 887.46,2341.03 887.46,2217.83 966.91,2138.38 ; 966.91,2137.71 1123.43,2137.71 1200.21,2060.93 1220.21,2060.93 1226.69,2067.41 1244.23,2067.41 1253.47,2058.17 1269.75,2058.17 1272.48,2060.89 1449.91,2060.89 1564.19,1946.62 2076.39,1946.62 2183.39,2053.62 R1371.2@2183.39,2087.88
NOR_IO3: R507.1 R1370.2 | length 1466.6
  SIG1 w5.5: v1(1143.28,2170.48) 1143.28,2139.07 1192.5,2089.85 1247.47,2089.85 1250.27,2092.65 1268.15,2092.65 1270.95,2089.85 1460.59,2089.85 1581.77,1968.67 1609.82,1968.67 ccw(c1609.82,1976.38) 1617.53,1976.38 1617.53,1981.02 cw(c1625.28,1981.02) 1633.03,1981.02 1633.03,1976.06 ccw(c1640.78,1976.06) 1648.53,1976.06 1648.53,1981.02 cw(c1656.28,1981.02) 1664.03,1981.02 1664.03,1976.06 ccw(c1671.78,1976.06) 1679.53,1976.06 1679.53,1981.02 cw(c1687.28,1981.02) 1695.03,1981.02 1695.03,1976.06 ccw(c1702.78,1976.06) 1710.53,1976.06 1710.53,1981.02 cw(c1718.28,1981.02) 1726.03,1981.02 1726.03,1976.06 ccw(c1733.78,1976.06) 1741.53,1976.06 1741.53,1981.02 cw(c1749.28,1981.02) 1757.03,1981.02 1757.03,1976.06 ccw(c1764.78,1976.06) 1772.53,1976.06 1772.53,1981.02 cw(c1780.28,1981.02) 1788.03,1981.02 1788.03,1976.06 ccw(c1795.78,1976.06) 1803.53,1976.06 1803.53,1981.02 cw(c1811.28,1981.02) 1819.03,1981.02 1819.03,1976.06 ccw(c1826.78,1976.06) 1834.53,1976.06 1834.53,1981.02 cw(c1842.28,1981.02) 1850.03,1981.02 1850.03,1976.38 ccw(c1857.92,1976.38) 1857.92,1968.49 2035.69,1968.49 2056.56,1989.36 2056.56,2067.29 2046.19,2077.66 1969.73,2077.66 1962.02,2085.37 1962.02,2099.33 1979.73,2117.04 R1370.2@1979.73,2118.11
NOR_IO4: R502.1 R1334.2 | length 1790.4
  SIG1 w5.5: v1@1234.74,2046.88 1444.2,2046.88 1555.76,1935.32 2081.93,1935.32 2215.38,2068.77 R1334.2@2215.38,2087.88
  SIG3 w5.5: v1(1217.05,2132.69) 1204.18,2145.55 1204.18,2156.82 1204.18,2159.57 ccw(c1196.43,2159.57) 1196.43,2167.32 1188.77,2167.32 cw(c1188.77,2175.07) 1188.77,2182.82 1196.69,2182.82 ccw(c1196.69,2190.57) 1196.69,2198.32 1188.31,2198.32 cw(c1188.31,2206.07) 1188.31,2213.82 1196.69,2213.82 ccw(c1196.69,2221.57) 1196.69,2229.32 1189.23,2229.32 cw(c1189.23,2237.07) 1189.23,2244.82 1196.43,2244.82 ccw(c1196.43,2252.57) 1204.18,2252.57 1204.18,2271.07 1204.18,2273.76 1212.77,2282.35 1228.99,2282.35 1234.49,2276.84 1234.49,2246.32 cw(c1226.74,2246.32) 1226.74,2238.57 1223.71,2238.57 ccw(c1223.71,2230.82) 1223.71,2223.07 1235.59,2223.07 cw(c1235.59,2215.32) 1235.59,2207.57 1223.71,2207.57 ccw(c1223.71,2199.82) 1223.71,2192.07 1236.6,2192.07 cw(c1236.6,2184.32) 1236.6,2176.57 1223.71,2176.57 ccw(c1223.71,2168.82) 1223.71,2161.07 1226.74,2161.07 cw(c1226.74,2153.32) 1234.49,2153.32 1234.49,2137.82 ccw(c1242.24,2137.82) 1242.24,2130.07 1253.89,2130.07 cw(c1253.89,2122.32) 1253.89,2114.57 1223.71,2114.57 ccw(c1223.71,2106.82) 1223.71,2099.07 1226.74,2099.07 cw(c1226.74,2091.32) 1234.49,2091.32 v1(1234.49,2050.35)
NOR_IO5: R504.1 R1336.2 | length 1560.1
  SIG1 w5.5: v1(1203.5,2029.9) 1214.63,2018.77 1433.76,2018.77 1540.36,1912.17 2093.1,1912.17 2248.66,2067.73 2259.22,2067.73 R1336.2@2279.37,2087.88
  SIG3 w5.5: v1@1138.31,2345.37 1163.79,2319.89 1163.79,2277.28 cw(c1155.63,2277.28) 1154.7,2269.18 ccw(c1154.7,2261.43) 1154.7,2253.68 cw(c1155.66,2245.32) 1164.07,2245.32 1164.07,2069.34 v1(1203.5,2029.9)
  other v1: 1137.38,2345.15
NOR_IO6: R506.1 R1321.2 | length 1751.5
  SIG1 w4: v2(1506.38,2517.52) 1551.6,2517.52 R1321.2@1552.04,2517.08
  SIG3 w5.5: v1(1137.88,2460.44) 1106.5,2491.82 1091.73,2491.82 cw(c1091.73,2499.57) 1083.98,2499.57 1083.98,2512.97 ccw(c1076.23,2512.97) 1068.48,2512.97 1068.48,2486.05 cw(c1060.73,2486.05) 1052.98,2486.05 1052.98,2519.83 ccw(c1045.23,2519.83) 1037.48,2519.83 1037.48,2486.89 cw(c1029.73,2486.89) 1021.98,2486.89 1021.98,2528.05 ccw(c1014.23,2528.05) 1006.48,2528.05 1006.48,2499.57 cw(c998.73,2499.57) 998.73,2491.82 982.52,2491.82 970.26,2504.07 970.26,2609.26 cw(c978.52,2609.22) 986.77,2609.26 986.78,2566.71 ccw(c994.53,2566.71) 1002.28,2566.71 1002.28,2609.26 cw(c1010.03,2609.26) 1017.78,2609.26 1017.78,2566.71 ccw(c1025.53,2566.71) 1033.28,2566.71 1033.28,2609.26 cw(c1041.03,2609.26) 1048.78,2609.26 1048.78,2566.71 ccw(c1056.53,2566.71) 1064.28,2566.71 1064.28,2609.26 cw(c1072.03,2609.26) 1079.78,2609.26 1079.78,2566.71 ccw(c1087.53,2566.71) 1095.28,2566.71 1095.28,2609.26 cw(c1103.03,2609.26) 1110.78,2609.26 1110.78,2566.71 ccw(c1118.53,2566.71) 1126.28,2566.71 1126.28,2609.26 cw(c1134.03,2609.26) 1141.78,2609.26 1141.78,2566.71 ccw(c1149.53,2566.71) 1157.28,2566.71 1157.28,2571.19 cw(c1165.03,2571.19) 1170.51,2576.67 1182.29,2564.88 v1(1182.29,2530.72)
  SIG6 w5: v1(1182.29,2530.72) 1197.55,2515.47 1248.54,2515.47 ; 1376.06,2537.03 1433.79,2537.03 1456.12,2514.7 1503.56,2514.7 v2(1506.38,2517.52)
  SIG6 w5.5: 1248.55,2515.48 1252.42,2519.34 1358.37,2519.34 1376.06,2537.03
NOR_IO7: R508.1 R1330.2 | length 33.6
  SIG1 w6: R508.1@1250.63,2133.09 R1330.2@1284.2,2133.09
NOR_SCLK: R1375.2 U500.6 U501.6 | length 2597.2
  SIG1 w5.5: v1@1253.84,2074.74 v1@1254.17,2075.07 ; v1@1254.17,2074.98 1455.06,2074.98 1571.99,1958.06 2049.27,1958.06 2055.87,1964.66 cw(c2060.12,1960.42) 2064.36,1964.66 2067.48,1961.54 ccw(c2071.73,1965.78) 2075.97,1970.02 2069.07,1976.92 cw(c2073.33,1981.15) 2077.55,1985.41 2084.49,1978.47 ccw(c2088.74,1982.71) 2092.98,1986.95 2079.79,2000.14 R1375.2@2079.79,2020.19
  SIG3 w5.5: v1(1259.36,2229.98) 1276.34,2213 cw(c1270.86,2207.52) 1270.86,2199.77 1262.98,2199.77 ccw(c1262.98,2192.02) 1262.98,2184.27 1286.56,2184.27 cw(c1286.56,2176.52) 1286.56,2168.77 1262.98,2168.77 ccw(c1262.98,2161.02) 1262.98,2153.27 1281.56,2153.27 cw(c1281.56,2145.52) 1289.31,2145.52 1289.31,2127.32 ccw(c1297.06,2127.32) 1297.06,2119.57 1303.92,2119.57 cw(c1303.92,2111.82) 1303.92,2104.07 1296.01,2104.07 ccw(c1296.01,2096.32) 1296.01,2088.57 1303.92,2088.57 cw(c1303.92,2080.82) 1303.92,2073.07 1296.01,2073.07 ccw(c1296.01,2065.32) 1296.01,2057.57 1303.92,2057.57 cw(c1303.92,2049.82) 1303.92,2042.07 1296.01,2042.07 ccw(c1296.01,2034.32) 1296.01,2026.57 1303.92,2026.57 cw(c1303.92,2018.82) 1303.92,2011.07 1296.01,2011.07 ccw(c1296.01,2003.32) 1296.01,1995.57 1303.92,1995.57 cw(c1303.92,1987.82) 1303.92,1980.07 1297.06,1980.07 ccw(c1297.06,1972.32) 1289.31,1972.32 1289.31,1942.7 1282.42,1935.82 1268,1935.82 1259.67,1944.14 1259.67,1950.57 1259.67,1968.82 cw(c1267.42,1968.82) 1267.42,1976.57 1267.85,1976.57 ccw(c1267.85,1984.32) 1267.85,1992.07 1254.58,1992.07 cw(c1254.58,1999.82) 1254.58,2007.57 1267.85,2007.57 ccw(c1267.85,2015.32) 1267.85,2023.07 1254.58,2023.07 cw(c1254.58,2030.82) 1254.58,2038.57 1267.85,2038.57 ccw(c1267.85,2046.32) 1267.85,2054.07 1267.42,2054.07 cw(c1267.42,2061.82) 1259.67,2061.82 1259.67,2074.63 v1(1259.67,2075.29)
  SIG6 w6: v1(966.17,2230.01) 966.17,2211.05 ccw(c974.17,2211.05) 974.17,2203.05 975.47,2203.05 cw(c975.47,2195.05) 975.47,2187.05 957.99,2187.05 ccw(c957.99,2179.05) 957.99,2171.05 975.47,2171.05 cw(c975.47,2163.05) 975.47,2155.05 957.99,2155.05 ccw(c957.99,2147.05) 957.99,2139.05 975.47,2139.05 cw(c975.47,2131.05) 975.47,2123.05 957.99,2123.05 ccw(c957.99,2115.05) 957.99,2107.05 958.3,2107.05 cw(c958.3,2099.05) 966.3,2099.05 966.3,2092.13 983.91,2074.53 1053.93,2074.53 ccw(c1053.93,2082.53) 1061.93,2082.53 1061.93,2083.82 cw(c1069.93,2083.82) 1077.93,2083.82 1077.93,2073.05 ccw(c1085.93,2073.05) 1093.93,2073.05 1093.93,2083.82 cw(c1101.93,2083.82) 1109.93,2083.82 1109.93,2073.05 ccw(c1117.93,2073.05) 1125.93,2073.05 1125.93,2083.82 cw(c1133.93,2083.82) 1141.93,2083.82 1141.93,2073.05 ccw(c1149.93,2073.05) 1157.93,2073.05 1157.93,2083.82 cw(c1165.93,2083.82) 1173.93,2083.82 1173.93,2073.05 ccw(c1181.93,2073.05) 1189.93,2073.05 1189.93,2083.82 cw(c1197.93,2083.82) 1205.93,2083.82 1205.93,2082.53 ccw(c1213.93,2082.53) 1213.93,2074.53 1258.91,2074.53 v1(1259.67,2075.29)
NRST: C1300.1 R420.2 R421.1 R706.1 R1372.2 U1200.K1 U1301.1 | length 3262.3
  SIG1 w8: v1(1368.5,3000.92) R420.2@1404.29,3000.92 ; v1(1898.64,2120.32) 1899.28,2119.69 R1372.2@1911.8,2119.69 1911.8,2120.16 C1300.1@1948.14,2156.5 ; C1300.1@1948.93,2156.5 1957.35,2164.91 1957.35,2171.56 1988.56,2202.77 U1200.K1@1988.56,2227.85
  SIG3 w8: v1(1307.83,2151.12) 1307.83,2205.6 1261.94,2251.48 1261.94,2786.87 1336.68,2861.61 1336.68,2970.24 1367.36,3000.92 v1(1368.5,3000.92) ; v2(1734.73,1734.7) 2029.18,1734.7 2090.37,1795.89 2400.94,1795.89 2505.11,1900.06 2614.5,1900.06 2667.23,1952.8 2667.23,2049.64 v1(2649.83,2067.05)
  SIG6 w8: v1@1307.83,2150.84 1307.83,2126.21 1360.54,2073.5 1668.97,2073.5 1689.03,2093.56 1734.73,2093.56 ; v2(1734.73,1734.7) 1734.73,2093.56 ; v1(1898.64,2120.32) 1871.88,2093.56 1734.73,2093.56
SDRAM_CAS: R1332.2 U300.K7 | length 546.6
  SIG1 w6: U300.K7@2000.37,3131.19 v2(2016.12,3115.44)
  SIG3 w5.5: v1(1612.96,3112.65) 1616.95,3112.65 1698.49,3194.19 1749.76,3194.19 cw(c1749.77,3186.44) 1757.52,3186.44 1757.52,3172.65 ccw(c1765.27,3172.62) 1773.02,3172.65 1773.02,3186.44 cw(c1780.77,3186.44) 1780.77,3194.19 1895.28,3194.19 1927.4,3162.06 1927.4,3150.55 1962.4,3115.55 v2@2018.85,3115.55
SDRAM_CKE: R1343.2 U300.J2 | length 1484
  SIG1 w6: U300.J2@1968.87,2973.71 v2(1984.62,2989.46)
  SIG6 w5.5: v2@1984.9,2991.09 1984.29,2991.7 1984.29,3002.72 1997.77,3016.2 2083.72,3016.2 ccw(c2083.72,3024.2) 2091.72,3024.2 2091.72,3031.59 cw(c2099.72,3031.59) 2107.72,3031.59 2107.72,3020.43 ccw(c2115.72,3020.43) 2123.72,3020.43 2123.72,3031.59 cw(c2131.72,3031.59) 2139.72,3031.59 2139.72,3020.43 ccw(c2147.72,3020.43) 2155.72,3020.43 2155.72,3031.59 cw(c2163.72,3031.59) 2171.72,3031.59 2171.72,3013.65 ccw(c2179.72,3013.65) 2187.72,3013.65 2187.72,3038.61 cw(c2195.72,3038.61) 2203.72,3038.61 2203.72,3015.43 ccw(c2211.72,3015.43) 2219.72,3015.43 2219.72,3038.61 cw(c2227.72,3038.61) 2235.72,3038.61 2235.72,3010.29 ccw(c2243.72,3010.29) 2251.72,3010.29 2251.72,3038.61 cw(c2259.72,3038.61) 2267.72,3038.61 2267.72,3008.34 ccw(c2275.72,3008.34) 2283.72,3008.34 2283.72,3031.47 cw(c2291.72,3031.47) 2291.72,3039.47 2316.99,3039.47 2321.08,3035.38 2325.7,3030.76 2325.7,3021 cw(c2317.95,3021) 2317.95,3013.25 2307.07,3013.25 ccw(c2307.07,3005.5) 2307.07,2997.75 2322.95,2997.75 cw(c2322.95,2990) 2322.95,2982.25 2293.73,2982.25 ccw(c2293.73,2974.5) 2293.73,2966.75 2322.95,2966.75 cw(c2322.95,2959) 2322.95,2951.25 2291.96,2951.25 ccw(c2291.96,2943.5) 2291.96,2935.75 2317.95,2935.75 cw(c2317.95,2928) 2325.7,2928 2325.7,2916.18 2325.7,2912.4 2313.15,2899.84 2309.15,2899.84 cw(c2309.15,2907.84) 2301.15,2907.84 ccw(c2293.15,2907.84) 2285.15,2907.84 2285.15,2902.84 cw(c2277.15,2902.84) 2269.15,2902.84 2269.15,2922.34 ccw(c2261.15,2922.34) 2253.15,2922.34 2253.15,2903.32 cw(c2245.15,2903.32) 2237.15,2903.32 2237.15,2922.69 ccw(c2229.15,2922.69) 2221.15,2922.69 2221.15,2903.56 cw(c2213.15,2903.56) 2205.15,2903.56 2205.15,2921.6 ccw(c2197.15,2921.6) 2189.15,2921.6 2189.15,2907.84 cw(c2181.15,2907.84) 2181.15,2899.84 2149.03,2899.84 2137.24,2888.05 v2(2137.24,2857.96)
SDRAM_CLK: R1318.2 U300.J1 | length 1411.3
  SIG1 w6: v2@1968.87,2926.59 U300.J1@1968.87,2942.21
  SIG6 w5.5: v2(1789.4,2857.96) 1770.01,2857.96 cw(c1770.01,2865.65) 1762.31,2865.65 1762.31,2875.87 ccw(c1754.56,2875.87) 1746.81,2875.87 1746.81,2865.97 cw(c1738.04,2865.97) 1738.04,2857.19 1731.63,2857.19 cw(c1731.63,2877.01) 1717.61,2862.99 1701.75,2878.85 cw(c1708.73,2885.83) 1701.75,2892.81 1709.61,2900.67 ccw(c1704.15,2906.17) 1698.65,2911.63 1686.7,2899.68 cw(c1680.79,2905.57) 1674.9,2911.48 1686.81,2923.39 ccw(c1681.35,2928.89) 1675.85,2934.35 1666.95,2925.46 cw(c1660.11,2932.3) 1653.26,2925.46 cw(c1660.85,2935) 1648.65,2935 cw(c1657,2935) 1657,2943.35 1662.65,2943.35 ccw(c1662.62,2951.23) 1662.65,2959.11 1641.67,2959.11 cw(c1641.67,2966.63) 1636.35,2971.96 1655.43,2991.03 cw(c1661.32,2985.14) 1669.66,2985.14 1669.66,2978.9 ccw(c1678.94,2978.63) 1688.23,2978.63 1688.23,2983.76 cw(c1696.31,2983.76) 1704.38,2983.76 1704.38,2939.12 ccw(c1716.16,2939.12) 1716.16,2927.35 1729.98,2927.35 cw(c1729.98,2917.72) 1739.61,2917.72 1739.61,2905.9 ccw(c1747.36,2905.9) 1755.11,2905.9 1755.11,2927.95 cw(c1762.86,2927.95) 1770.61,2927.95 1770.61,2913.21 ccw(c1778.36,2913.21) 1786.11,2913.21 1786.11,2919.63 cw(c1795.62,2919.63) 1794.48,2929.08 1808.2,2929.08 cw(c1807.29,2920.93) 1813.07,2915.12 1794.34,2896.39 ccw(c1800,2890.74) 1805.65,2885.08 1830.6,2910.04 cw(c1836.13,2904.54) 1841.63,2899.01 1827.96,2885.35 ccw(c1833.87,2879.5) 1839.72,2873.59 1847.2,2881.07 cw(c1853.2,2875.07) 1859.2,2881.07 1863.9,2876.37 cw(c1847.83,2863.55) 1868.39,2863.55 1868.39,2855.75 ccw(c1884.25,2855.75) 1884.25,2839.89 cw(c1884.25,2824.2) 1899.94,2824.2 ccw(c1918.17,2821.74) 1918.17,2803.34 1933.24,2803.34 cw(c1933.24,2795.59) 1940.99,2795.59 1940.99,2786.06 ccw(c1948.74,2786.06) 1956.49,2786.06 1956.49,2798.73 cw(c1964.24,2798.73) 1971.99,2798.73 1971.99,2786.06 ccw(c1979.74,2786.06) 1987.49,2786.06 1987.49,2795.59 cw(c1995.24,2795.59) 1995.24,2803.34 1998,2803.34 2011.52,2803.34 ccw(c2011.21,2821.15) 2011.22,2838.96 cw(c2011.22,2855.38) 1994.8,2855.38 1994.8,2900.66 v2(1969,2926.47)
SDRAM_CS: R1341.2 U300.J8 | length 1411.8
  SIG1 w6: v2(1953.12,3146.94) U300.J8@1968.87,3162.69
  SIG6 w5.5: v2(1953.12,3146.94) 2051.22,3048.84 2159.54,3048.84 2197.82,3087.13 cw(c2203.33,3081.62) 2211.11,3081.62 2211.11,3067.57 ccw(c2218.86,3067.57) 2226.61,3067.57 2226.61,3090.79 cw(c2234.36,3090.79) 2242.11,3090.79 2242.11,3067.75 ccw(c2249.86,3067.75) 2257.61,3067.75 2257.61,3090.79 cw(c2265.36,3090.79) 2273.11,3090.79 2273.11,3067.75 ccw(c2280.86,3067.75) 2288.61,3067.75 2288.61,3090.79 cw(c2296.36,3090.79) 2304.11,3090.79 2304.11,3067.75 ccw(c2311.86,3067.75) 2319.61,3067.75 2319.61,3090.79 cw(c2327.36,3090.79) 2335.11,3090.79 2335.11,3067.75 ccw(c2342.86,3067.75) 2350.61,3067.75 2350.61,3090.58 cw(c2358.36,3090.58) 2358.36,3098.33 2363.86,3098.33 2369.79,3092.4 2380.94,3081.26 2380.94,3068.36 2342.77,3030.19 2342.77,2871.77 2329.47,2858.47 2310.06,2858.47 cw(c2310.06,2866.22) 2302.31,2866.22 2302.31,2878.78 ccw(c2294.56,2878.78) 2286.81,2878.78 2286.81,2864.51 cw(c2279.06,2864.51) 2271.31,2864.51 2271.31,2878.78 ccw(c2263.56,2878.78) 2255.81,2878.78 2255.81,2864.51 cw(c2248.06,2864.51) 2240.31,2864.51 2240.31,2878.78 ccw(c2232.56,2878.78) 2224.81,2878.78 2224.81,2864.51 cw(c2217.06,2864.51) 2209.31,2864.51 2209.31,2878.78 ccw(c2201.56,2878.78) 2193.81,2878.78 2193.81,2866.22 cw(c2186.06,2866.22) 2186.06,2858.47 v2@2167.46,2858.47
  other v2: 2168.87,2857.96
SDRAM_RAS: R1378.2 U300.J9 | length 1525.3
  SIG1 w5.5: R1378.2@2361.46,2551.18 2361.87,2550.77 2390.9,2550.77 cw(c2390.9,2544.31) 2397.36,2544.31 2397.36,2503.37 ccw(c2405.11,2503.37) 2412.86,2503.37 2412.86,2546.24 cw(c2420.61,2546.24) 2428.36,2546.24 2428.36,2515.08 ccw(c2436.11,2515.08) 2443.86,2515.08 2443.86,2538.31 cw(c2451.61,2538.31) 2451.61,2546.06 2458.62,2546.06 v2(2471.38,2558.82)
  SIG1 w6: U300.J9@1968.87,3194.18 1968.87,3251.66 1969.01,3251.8 v2(1969.01,3252.1)
  SIG3 w4.5: v2(1969.01,3252.1) 1969.16,3251.95 1969.6,3252.39 2371.55,3252.39 2465.92,3158.02 2465.92,3144.94 2465.92,3012.18 2465.92,2953.77 2521.34,2898.35 2521.34,2608.79 v2(2471.38,2558.82)
SDRAM_WE: R1362.2 U300.K8 | length 1716.2
  SIG1 w4: U300.K8@2000.37,3162.69 1985.15,3147.47 1985.15,3126.37 2048.74,3062.77 2048.74,2990.59 v2(2047.61,2989.46)
  SIG3 w4.5: v2(2047.61,2989.46) 2062.87,3004.71 2157.29,3004.71 2374.2,2787.81 2374.2,2304.73 2331.69,2262.22 cw(c2326.22,2267.69) 2320.76,2262.22 2313.1,2269.88 ccw(c2308.86,2265.64) 2304.62,2261.39 2313.27,2252.74 cw(c2309.02,2248.5) 2304.78,2244.26 2295.65,2253.39 ccw(c2291.41,2249.14) 2287.17,2244.9 2296.3,2235.77 cw(c2292.05,2231.53) 2287.81,2227.29 2278.68,2236.42 ccw(c2274.44,2232.17) 2270.2,2227.93 2279.33,2218.8 cw(c2275.08,2214.56) 2270.84,2210.32 2261.81,2219.35 ccw(c2257.57,2215.1) 2253.32,2210.87 2262.53,2201.66 cw(c2258.46,2197.59) 2262.53,2193.52 cw(c2258.11,2197.94) 2253.7,2193.52 2246.84,2200.37 ccw(c2242.6,2196.13) 2238.36,2200.37 ccw(c2242.6,2196.13) 2238.36,2191.89 2245.38,2184.86 cw(c2241.14,2180.62) 2236.9,2176.38 2227.39,2185.89 ccw(c2223.15,2181.64) 2218.9,2177.4 2228.41,2167.89 cw(c2224.17,2163.65) 2219.93,2159.41 2209.4,2169.93 ccw(c2205.16,2165.69) 2200.91,2161.45 2210.45,2151.91 cw(c2206.21,2147.67) 2210.45,2143.43 2198.61,2131.59 2129.04,2131.59 v1(2117.99,2120.54)
SWCLK: R702.1 U1200.B14 | length 1135.8
  SIG1 w6: U1200.B14@1736.59,2637.3 v2(1752.34,2621.55)
  SIG6 w4.5: v2(1752.34,2621.55) 1761.98,2631.2 1814.64,2631.2 1831.08,2647.63 1831.08,2690.41 ; 1831.43,2690.41 1849.67,2708.66 1849.67,2723.66 1881.26,2755.24 1901.25,2755.24 ccw(c1901.25,2762.49) 1908.5,2762.49 1908.5,2787.59 cw(c1915.75,2787.59) 1923,2787.59 1923,2758.25 ccw(c1930.25,2758.25) 1937.5,2758.25 1937.5,2762.56 cw(c1944.75,2762.56) 1952,2762.56 1952,2758.25 ccw(c1959.25,2758.25) 1966.5,2758.25 1966.5,2762.56 cw(c1973.75,2762.56) 1981,2762.56 1981,2758.25 ccw(c1988.25,2758.25) 1995.5,2758.25 1995.5,2776.54 cw(c2002.75,2776.54) 2010,2776.54 2010,2762.49 ccw(c2017.25,2762.49) 2017.25,2755.24 2026.22,2755.24 2030.46,2751 2076.06,2751 2130.59,2805.53 ccw(c2121.83,2814.27) 2130.64,2805.58 ccw(c2121.84,2814.28) 2134.22,2814.28 2134.22,2814.59 cw(c2141.47,2814.59) 2148.72,2814.59 2148.72,2792.67 ccw(c2155.97,2792.67) 2163.22,2792.67 2163.22,2819.02 cw(c2170.47,2819.02) 2177.72,2819.02 2177.72,2792.67 ccw(c2184.97,2792.67) 2192.22,2792.67 2192.22,2819.02 cw(c2199.47,2819.02) 2206.72,2819.02 2206.72,2792.67 ccw(c2213.97,2792.67) 2221.22,2792.67 2221.22,2798.7 cw(c2228.47,2798.7) 2228.47,2805.95 2242.92,2805.95 ccw(c2242.92,2812.22) 2249.2,2812.22 2249.2,2818.05 cw(c2256.45,2818.05) 2263.7,2818.05 2263.7,2811.34 ccw(c2269.97,2811.34) 2276.25,2811.34 2276.25,2818.05 cw(c2283.5,2818.05) 2290.75,2818.05 2290.75,2799.76 ccw(c2297.89,2799.76) 2297.89,2792.62 2319.23,2792.62 v2(2319.23,2791.89)
SWDIO: R704.1 R1328.2 | length 2273.7
  SIG3 w5.5: v2(1552.04,2767.36) 1553.01,2766.39 1553.01,2676.92 1566.26,2663.67 1566.26,2605.46 1520.75,2559.95 1520.75,2324.09 1428.9,2232.23 1428.9,1980.29 1546.28,1862.91 2188.81,1862.91 2227.09,1824.63 2375.45,1824.63 2453.98,1903.16 2453.98,1966.13 2571.29,2083.44 2613.48,2083.44 v1(2635.22,2105.18)
SWO: R1338.2 U700.8 | length 25.3
  SIG1 w6: R1338.2@2420.19,2048.36 U700.8@2445.45,2048.36
T0: R1339.2 U704.14 | length 2290.2
  SIG1 w4: v2(2505.21,2368.14) 2505.84,2368.14 v2@2506.42,2368.72
  SIG1 w6: v2@2506.42,2368.72 U704.14@2554.01,2368.72
  SIG3 w5.5: v2(1786.58,2209.19) 1765.52,2230.25 1746.85,2230.25 cw(c1746.85,2238) 1746.85,2245.75 1760,2245.75 ccw(c1760,2253.84) 1768.08,2253.84 1768.08,2268.03 1751.6,2284.51 cw(c1762.73,2295.65) 1746.99,2295.65 1746.99,2308.29 ccw(c1739.24,2308.29) 1731.49,2308.29 1731.49,2290.52 cw(c1724.94,2290.52) 1724.94,2283.97 1704.58,2283.97 1704.58,2283.91 1700.84,2280.17 ccw(c1705.47,2275.54) 1700.84,2270.91 1708.22,2263.52 cw(c1702.77,2258.02) 1697.26,2252.56 1689.88,2259.95 ccw(c1685.25,2255.32) 1680.62,2259.95 1680.56,2259.95 1678.54,2257.94 1564.7,2257.94 1502.53,2195.76 1502.53,2036.16 1586.09,1952.6 1937.57,1952.6 ccw(c1937.57,1960.5) 1945.42,1961.33 cw(c1953.17,1961.33) 1960.92,1961.33 1960.92,1959.28 ccw(c1968.67,1959.28) 1976.42,1959.28 1976.42,1961.33 cw(c1984.17,1961.33) 1991.92,1961.33 1991.92,1959.28 ccw(c1999.67,1959.28) 2007.42,1959.28 2007.42,1961.33 cw(c2015.17,1961.33) 2022.92,1961.33 2022.92,1959.28 ccw(c2030.67,1959.28) 2038.42,1959.28 2038.42,1961.33 cw(c2046.17,1961.33) 2053.92,1961.33 2053.92,1959.28 ccw(c2061.67,1959.28) 2069.42,1959.28 2069.42,1961.33 cw(c2077.17,1961.33) 2084.92,1961.33 2084.92,1959.28 ccw(c2092.67,1959.28) 2100.42,1959.28 2100.42,1961.33 cw(c2108.17,1961.33) 2115.92,1961.33 2115.92,1959.28 ccw(c2123.67,1959.28) 2131.42,1959.28 2131.42,1961.33 cw(c2139.17,1961.33) 2146.92,1961.33 2146.92,1960.51 ccw(c2154.67,1960.51) 2154.67,1952.76 2203.92,1952.76 2232.98,1952.76 2281.23,1904.51 2335.45,1904.51 2397.87,1966.92 2397.87,1977.31 2478.45,2057.9 2478.45,2111.24 2500.05,2132.84 2500.05,2362.98 v2(2505.21,2368.14)
T1: R1340.2 U704.13 | length 2256.7
  SIG1 w6: v2(2534.29,2388.92) 2536.19,2388.92 2537.07,2388.04 2537.62,2388.59 U704.13@2553.81,2388.59
  SIG3 w5.5: v1(1641.59,2273.69) 1618.34,2296.94 1596.27,2296.94 1572.45,2273.12 1558.61,2273.12 1490.25,2204.76 1490.25,2026.23 1578.7,1937.78 2226.09,1937.78 2272.67,1891.2 2339.94,1891.2 2411.61,1962.88 2411.61,1973.54 2513.6,2075.53 2513.6,2325.28 2536.43,2348.11 2536.43,2358.05 2488.23,2406.25 2488.23,2427.55 2555.61,2494.93 cw(c2561.89,2488.65) 2568.17,2482.37 2552.34,2466.55 ccw(c2557.22,2461.67) 2552.34,2456.79 2567.75,2441.38 cw(c2562.15,2435.74) 2556.51,2430.14 2541.2,2445.45 ccw(c2535.73,2439.98) 2530.26,2445.45 2508.52,2423.71 2508.52,2410.57 2530.17,2388.92 v2(2534.29,2388.92)
T2: R1342.2 U704.12 | length 2242.2
  SIG1 w6: v2(2487.98,2385.57) 2487.98,2387.15 2508.91,2408.09 U704.12@2554.01,2408.09
  SIG3 w5.5: v1(1641.59,2242.35) 1623.91,2242.35 1604.04,2222.47 1547.22,2222.47 1514.87,2190.12 1514.87,2050.28 1597.41,1967.73 1609.27,1967.73 ccw(c1609.27,1975.48) 1617.02,1975.48 1617.02,1981.32 cw(c1624.77,1981.32) 1632.52,1981.32 1632.52,1975.11 ccw(c1640.27,1975.11) 1648.02,1975.11 1648.02,1981.32 cw(c1655.77,1981.32) 1663.52,1981.32 1663.52,1975.11 ccw(c1671.27,1975.11) 1679.02,1975.11 1679.02,1981.32 cw(c1686.77,1981.32) 1694.52,1981.32 1694.52,1975.11 ccw(c1702.27,1975.11) 1710.02,1975.11 1710.02,1981.32 cw(c1717.77,1981.32) 1725.52,1981.32 1725.52,1975.11 ccw(c1733.27,1975.11) 1741.02,1975.11 1741.02,1981.32 cw(c1748.77,1981.32) 1756.52,1981.32 1756.52,1975.11 ccw(c1764.27,1975.11) 1772.02,1975.11 1772.02,1981.32 cw(c1779.77,1981.32) 1787.52,1981.32 1787.52,1975.11 ccw(c1795.27,1975.11) 1803.02,1975.11 1803.02,1981.32 cw(c1810.77,1981.32) 1818.52,1981.32 1818.52,1975.11 ccw(c1826.27,1975.11) 1834.02,1975.11 1834.02,1981.32 cw(c1841.77,1981.32) 1849.52,1981.32 1849.52,1975.11 ccw(c1857.27,1975.11) 1865.02,1975.11 1865.02,1981.32 cw(c1872.77,1981.32) 1880.52,1981.32 1880.52,1975.48 ccw(c1888.27,1975.48) 1888.27,1967.73 1925.44,1967.73 1938.31,1980.61 2160.89,1980.61 2171.56,1991.28 cw(c2177.18,1985.66) 2185.12,1985.66 2185.12,1974.38 ccw(c2192.87,1974.38) 2200.62,1974.38 2200.62,1985.66 cw(c2208.37,1985.66) 2216.12,1985.66 2216.12,1975.48 ccw(c2223.87,1975.48) 2223.87,1967.73 2242.12,1967.73 2293.24,1916.62 2326.34,1916.62 2382.04,1972.32 2382.04,1978.17 2462.22,2058.36 2462.22,2156.35 cw(c2471.1,2156.35) 2471.1,2165.23 2479.17,2165.23 ccw(c2479.17,2172.98) 2479.17,2180.73 2471.1,2180.73 cw(c2471.1,2188.48) 2471.1,2196.23 2479.17,2196.23 ccw(c2479.17,2203.98) 2479.17,2211.73 2465.91,2211.73 cw(c2465.91,2219.48) 2465.91,2227.23 2479.17,2227.23 ccw(c2479.17,2234.98) 2479.17,2242.73 2464.72,2242.73 cw(c2464.72,2250.48) 2464.72,2258.23 2478.2,2258.23 ccw(c2478.2,2265.73) 2485.7,2265.73 2485.7,2387.11 2486.41,2387.13 v2(2487.98,2385.57)
T3: R1344.2 U704.11 | length 2208.9
  SIG1 w6: v2@2534.5,2427.77 U704.11@2554.01,2427.77
  SIG3 w5.5: v1(1642.54,2315.16) 1643.54,2314.17 1708.78,2314.17 cw(c1708.78,2306.42) 1708.78,2298.67 1685.81,2298.67 ccw(c1685.81,2292.12) 1679.26,2292.12 1679.26,2279.22 cw(c1671.51,2279.22) 1663.76,2279.22 1663.76,2292.12 ccw(c1657.21,2292.12) 1657.21,2298.67 1631.87,2298.67 1620.09,2310.44 1590.79,2310.44 1568.09,2287.74 1555.35,2287.74 1477.98,2210.37 1477.98,2018 1573.17,1922.81 2219.01,1922.81 2263.93,1877.88 2347.19,1877.88 2427.07,1957.76 2427.07,1969.95 2547.32,2090.2 2547.32,2119.35 2528.24,2138.44 2528.24,2319.71 2552.43,2343.9 2552.43,2413.08 2537.52,2427.99 v2@2535.09,2427.99
  other v2: 2534.29,2427.99
T_INT: J600.38 R600.1 U607.2 U607.9 | length 212.8
  SIG1 w5: U607.9@717.77,2183.42 731.74,2183.42 738.09,2177.07
  SIG1 w5.5: 738.09,2177.07 738.09,2157.85 750.73,2145.21 R600.1@765.64,2145.21
  SIG1 w6: J600.38@579.91,2183.42 U607.2@683.32,2183.42 U607.9@717.77,2183.42
T_SCL: J600.39 R601.1 U607.4 U607.7 | length 208.4
  SIG1 w6: J600.39@579.29,2164.35 617.67,2164.35 637.97,2144.05 U607.4@683.32,2144.05 U607.7@717.77,2144.05 732.6,2144.05 R601.1@765.64,2111
T_SDA: J600.40 R602.1 U607.5 U607.6 | length 185
  SIG1 w4: R602.1@717.77,2079.5 R602.1@719.4,2077.88
  SIG1 w6: J600.40@579.29,2144.66 615.55,2144.66 635.86,2124.36 U607.5@683.32,2124.36 U607.6@717.77,2124.36 R602.1@717.77,2088.5
TCLK: R1337.2 U704.15 | length 2158.5
  SIG1 w6: U704.15@2554.01,2349.03 2483.81,2349.03 2474.68,2339.9 2474.68,2324.26 2483.37,2315.57 2547.96,2315.57 v1(2554.27,2321.88)
  SIG3 w5.5: v2(1552.04,2302.99) 1465.71,2216.66 1465.71,2007.56 1565.44,1907.83 2212.3,1907.83 2255.56,1864.57 2354.06,1864.57 2440.07,1950.58 2440.07,1966.69 2569.28,2095.9 ccw(c2564.42,2100.76) 2571.29,2100.76 2571.29,2105.78 cw(c2579.04,2105.78) 2586.79,2105.78 2586.79,2100.75 ccw(c2595.06,2100.75) 2600.91,2094.9 2616.97,2110.95 2616.97,2131.63 2586.04,2162.55 2575.05,2162.55 cw(c2575.05,2170.3) 2575.05,2178.05 2581.04,2178.05 ccw(c2581.04,2183.36) 2586.35,2183.36 2586.35,2191.18 ccw(c2580.93,2191.19) 2580.93,2196.62 2575.07,2196.62 cw(c2575.07,2204.37) 2575.07,2212.12 2581.05,2212.12 ccw(c2581.05,2217.43) 2586.36,2217.43 2586.36,2221.54 2563.58,2244.32 2563.58,2312.57 v1(2554.27,2321.88)